# Altium PCB THB7128v1,1.PcbDoc
Units mm, origin at the board's own origin, x right, y up, seen from the top; angles counter-clockwise.
Board outline 461.77 x 306.45 mm, 2 copper layers (Top Layer, Bottom Layer); 27 components, 19 nets, 85 pads, 20 vias.
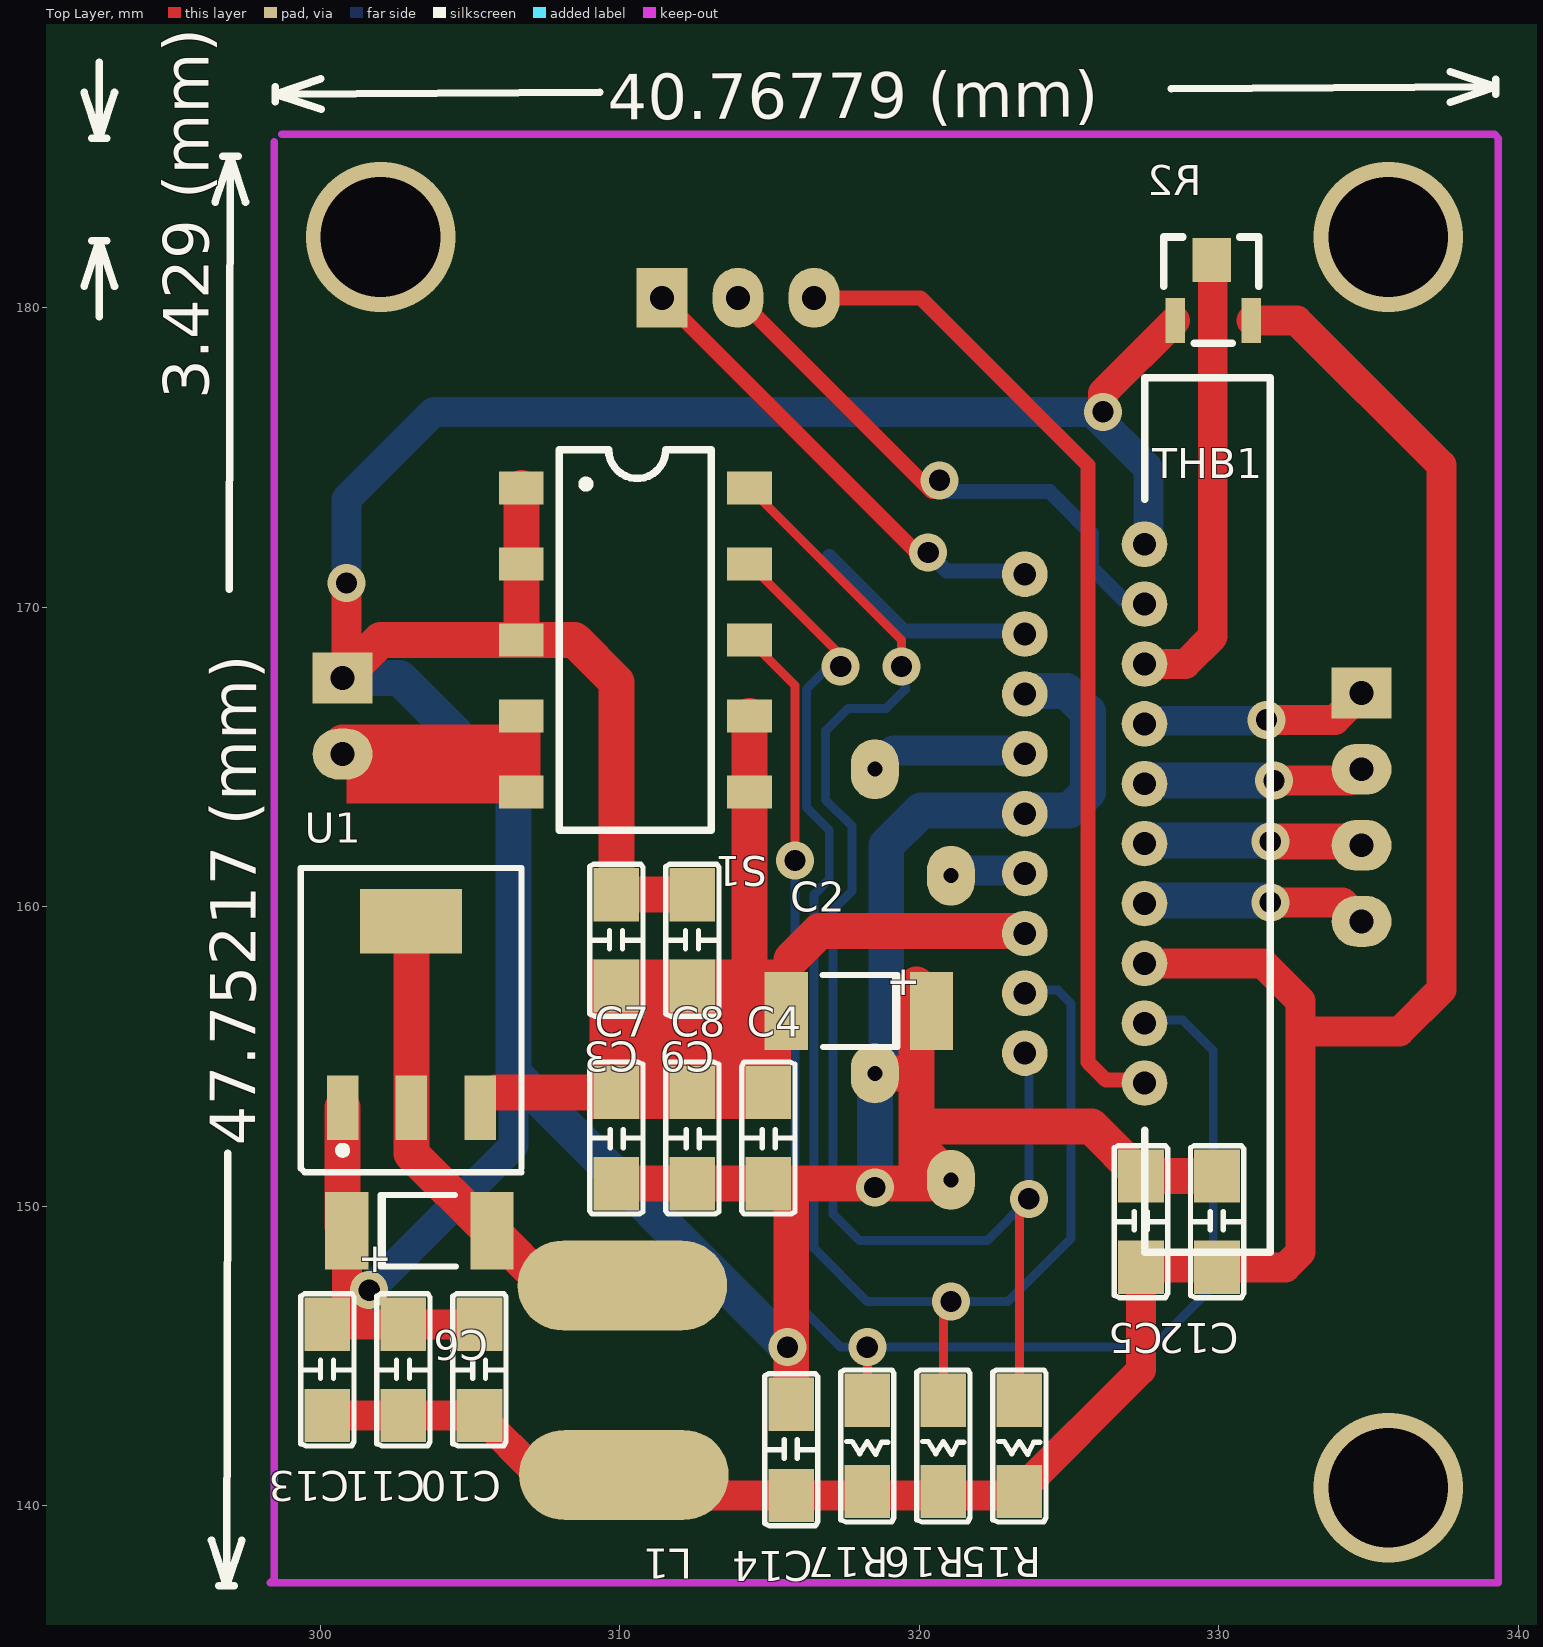
[diagram p0: Top Layer view]
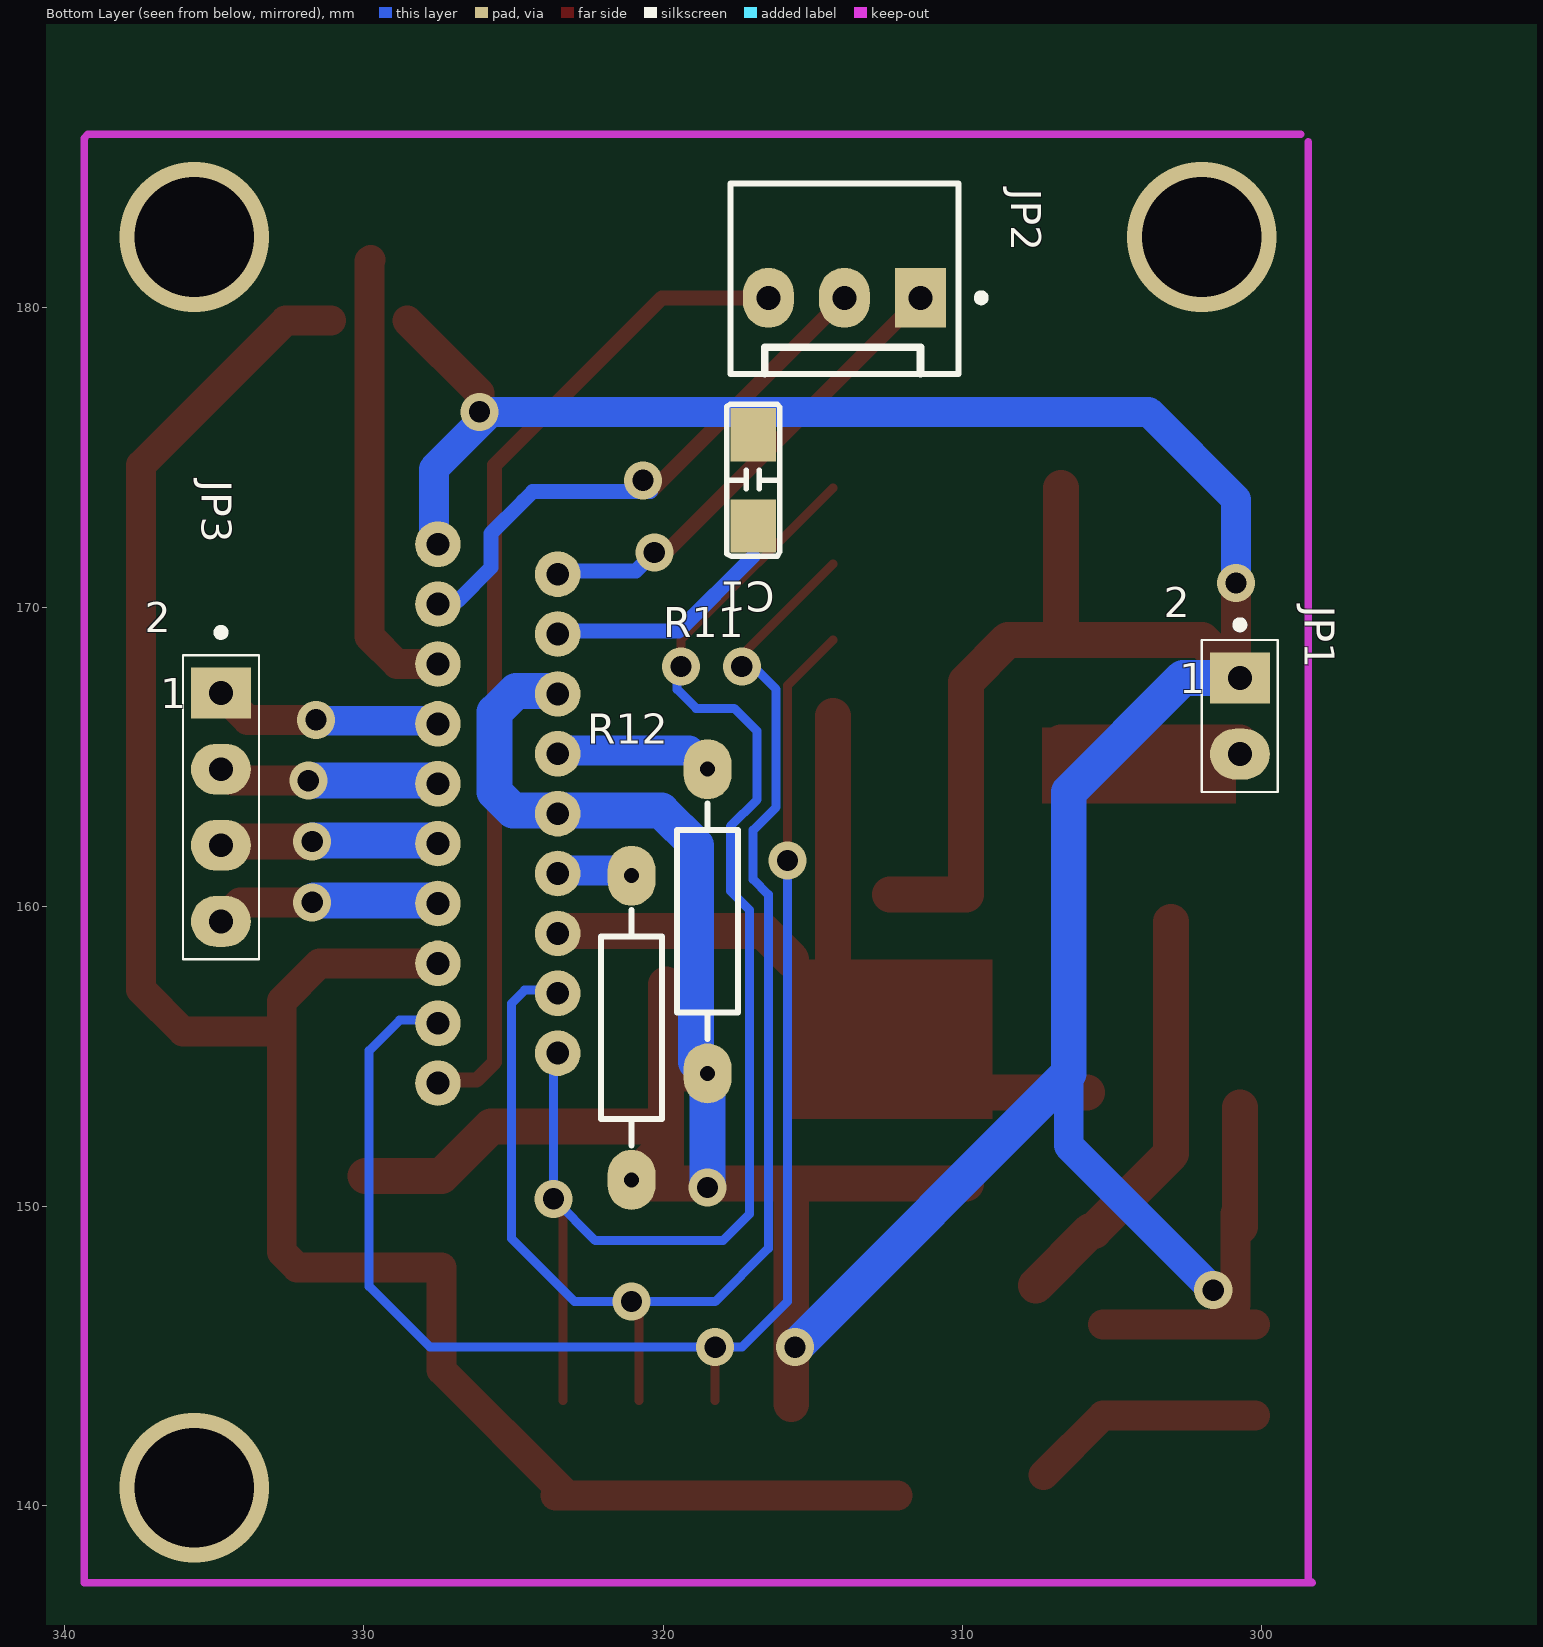
[diagram p1: Bottom Layer view, seen from below]

## Layer stack, top to bottom
Top Layer: signal copper 0.0356
Dielectric: dielectric 0.32, FR-4, Dk 4.8
Bottom Layer: signal copper 0.0356

## Board outline
84.709,340.995 84.709,36.068 86.233,34.544 546.481,34.544 546.481,340.995

## Design rules (kind name [scope] priority, off if disabled: settings)
Clearance [All] p1: gap=0.254
HoleSize [All] p1: absolutevalues=TRUE maxlimit=7 minlimit=0.025 maxpercent=80.000 minpercent=20.000
HoleToHoleClearance [All] p1 off: gap=0.254 allowstackedmicrovias=TRUE
LayerPairs [All] p1 off: enforce=TRUE
MinimumSolderMaskSliver [All] p1 off: minsoldermaskwidth=0.254
NetAntennae [All] p1 off: netantennaetolerance=0
PolygonConnect [All] p1: connectstyle=Relief reliefconductorwidth=0.254 reliefentries=4 polygonreliefangle="90 Angle"
RoutingVias [All] p1: holewidth=0.711 width=1.27 viastyle="Through Hole" minholewidth=0.711 minwidth=1.27 maxholewidth=0.711 maxwidth=1.27
SilkToSilkClearance [All] p1 off: silktosilkclearance=0.254
SilkscreenOverComponentPads [All] p1 off: minsilkscreentomaskgap=0.254
SolderMaskExpansion [All] p1: expansion=0.102
TestPointUsage [All] p1: valid=0 allowmultiple=FALSE
Testpoint [All] p1: side=15 testpointundercomponent=TRUE minsize=1.016 maxsize=2.54 preferedsize=1.524 minholesize=0 maxholesize=1.016 preferedholesize=0.813 testpointgrid=0.025 style=1023 order=0123456789
Width [All] p1: maxlimit=2 minlimit=0.3 preferedwidth=0.8
17 further rules are at their usual default settings.

## Components (designator, comment, footprint, x,y, rotation, side; value= is the part's Value field where it differs from the comment)
C1 "CAP" CC1005-0402 316.992,175.768 r270 bottom
C2 "Cap Pol1" "diode stan" 318.008,156.464 r0 top
C3 "CAP_1" CC1005-0402 309.88,160.401 r270 top
C4 "CAP" CC1005-0402 314.96,150.749 r90 top
C5 "CAP" CC1005-0402 327.406,151.003 r270 top
C6 "Cap Pol1" "diode stan" 303.276,149.225 r180 top
C7 "CAP_1" CC1005-0402 309.88,150.749 r90 top
C8 "CAP_1" CC1005-0402 312.42,150.749 r90 top
C9 "CAP_1" CC1005-0402 312.42,160.401 r270 top
C10 "CAP_1" CC1005-0402 305.308,146.05 r270 top
C11 "CAP_1" CC1005-0402 302.768,146.05 r270 top
C12 "CAP_1" CC1005-0402 329.946,151.003 r270 top
C13 "CAP_1" CC1005-0402 300.228,146.05 r270 top
C14 "CAP_1" CC1005-0402 315.722,143.383 r270 top
JP1 "Header 2" HDR1-2 300.736,167.64 r180 bottom
JP2 "H-3" "H- 3" 311.404,180.34 r270 bottom
JP3 "Header 4" HDR1-4 334.772,167.132 r180 bottom
L1 "INDUCTOT" 贴片电感 313.436,148.336 r180 top
R2 "RES-Pot2" res-adj-tiepian 328.168,178.816 r0 top
R11 "Res" AXLAL0.4 318.516,159.512 r90 bottom
R12 "Res" AXLAL0.4 321.056,155.956 r90 bottom
R15 "Res" R2012-0805 323.342,143.51 r270 top
R16 "Res" R2012-0805 320.802,143.51 r270 top
R17 "Res" R2012-0805 318.262,143.51 r270 top
S1 "SW-DIP5" SW-5 306.705,173.99 r270 top
THB1 "U1" THB7218 331.724,148.336 r90 top
U1 "LM1117" DSO-G3/P2.3 300.736,153.289 r0 top

## Footprints (in the part's own frame and the unit in brackets; to place one, negate y for a bottom-side part, rotate by r counter-clockwise, add the part's x,y. Pads: shape width x height; smd on the part's side, far side on the other; paste and mask are expansions set on the pad)
AXLAL0.4 [mm]
  oval 2x1.6 hole 0.5: 1(-5.08,0) 2(5.08,0)
  silkscreen extent -3.94,-1.02 3.94,1.02
CC1005-0402 [mil]
  rect 70x60 smd: 1(0,0) 2(120,0)
  silkscreen extent -40,-35 160,35
"diode stan" [mm]
  rect 1.45x2.6 smd: 1(-2.45,0.051) 2(2.4,0.051)
  silkscreen extent -1.24,-1.15 1.27,1.25, body extent -2.51,-1.24 2.44,1.35, height 1.27
DSO-G3/P2.3 [mil]
  rect 41.34x85 smd: 1(181.1,0) 2(0,0) 3(90.55,0)
  rect 133.86x85 smd: 3(90,245)
  silkscreen extent -55,-85 235,315
"H- 3" [mm]
  rect 2x1.7 hole 0.8: 1(0,0)
  oval 2x1.7 hole 0.8: 2(0,-2.54) 3(0,-5.08)
  silkscreen extent -3.81,-6.35 2.54,2.15
HDR1-2 [mm]
  rect 2x1.7 hole 0.8 unplated: 1(0,0)
  oval 2x1.7 hole 0.8 unplated: 2(0,-2.54)
  silkscreen extent -1.27,-3.81 1.27,1.9
HDR1-4 [mm]
  rect 2x1.7 hole 0.8 unplated: 1(0,0)
  oval 2x1.7 hole 0.8 unplated: 2(0,-2.54) 3(0,-5.08) 4(0,-7.62)
  silkscreen extent -1.27,-8.89 1.27,2.15
R2012-0805 [mil]
  rect 70x60 smd: 1(0,0) 2(120,0)
  silkscreen extent -40,-35 160,35
res-adj-tiepian [mm]
  rect 0.66x1.5 smd: 1(2.921,0.762) 3(0.381,0.762)
  rect 1.3x1.47 smd: 2(1.6,2.794)
  silkscreen extent 0,0 3.17,3.56
SW-5 [mm]
  rect 1.1x1.5 smd: 1(0,0) 2(2.54,0) 3(5.08,0) 4(7.62,0) 5(10.16,0) 6(10.16,7.62) 7(7.62,7.62) 8(5.08,7.62) 9(2.54,7.62) 10(0,7.62)
  silkscreen extent -1.27,1.27 11.43,6.35
THB7218 [mil]
  round 60 hole 30: 1(935.91,165.35) 2(896.54,322.83) 3(857.17,165.35) 4(817.8,322.83) 5(778.43,165.35) 6(739.06,322.83) 7(699.69,165.35) 8(660.31,322.83) 9(620.94,165.35) 10(581.57,322.83) 11(542.2,165.35) 12(502.83,322.83) 13(463.46,165.35) 14(424.09,322.83) 15(384.72,165.35) 16(345.35,322.83) 17(305.98,165.35) 18(266.61,322.83) 19(227.24,165.35)
  silkscreen extent 5,0 1155,165
贴片电感 [mm]
  oval 7x3 smd: 1(3.353,0.991) 2(3.302,7.315)
  body extent -0.33,0.44 6.76,7.54, height 1.27

## Part data
C1 C3 C4 C5 C7 C8 C9 C10 C11 C12 C13 C14: "Capacitor"
C2 C6: "Polarized Capacitor (Radial)"
JP1: library part "Header 2X2", "Header, 2-Pin, Dual row"
JP2: "Header, 3-Pin"
JP3: library part "Header 2X4", "Header, 4-Pin, Dual row"
L1: "Inductor"
R2: "Potentiometer"
R11 R12 R15 R16 R17: "Resistor"
S1: "DIP Switch,5-bit"
THB1: library part THB7128

## Via types
v1: diameter 1.27, hole 0.711, Top Layer to Bottom Layer, 17 vias
v2: diameter 5, hole 4, Top Layer to Bottom Layer, 3 vias

## Nets (pads, with @x,y where several pads share a name; then routed paths per layer and width w, separated by ;. In a path a pad name is that pad's centre, name@x,y a point inside that pad or via, vN(x,y) a via of type N, cw(c..) or ccw(c..) an arc to the next point about the centre after c; other vN are vias at no path point)
CLK: JP2.2 THB1.3 | length 18.6
  Top Layer w0.5: JP2.2 v1@320.421,173.863
  Bottom Layer w0.5: v1@320.421,173.863 324.358,173.863 324.675,173.546 325.755,172.466 325.755,171.323 326.866,170.212 THB1.3@327.66,170.212
  other v1: 320.675,174.244
CWW: JP2.1 THB1.2 | length 15.7
  Top Layer w0.5: JP2.1 315.404,176.339 v1@319.913,171.831
  Bottom Layer w0.5: v1(320.294,171.831) 320.913,171.212 THB1.2@323.66,171.212
EN: JP2.3 THB1.19 | length 33.7
  Top Layer w0.5: JP2.3 320.04,180.34 325.628,174.752 325.628,154.813 326.229,154.212 THB1.19@327.66,154.212
GND: C1.1 C2.2 C3.1 C4.1 C5.1 C6.2 C7.1 C8.1 C9.1 C10.1 C11.1 C12.1 C13.1 C14.1 JP1.1 R2.3 R11.1 R12.1 S1.1 S1.2 S1.3 THB1.1 THB1.6 THB1.10 U1.2 | length 180.6
  Top Layer w1: C13.1 C11.1 ; JP1.1@300.863,167.767 v1(300.863,170.815) ; C6.2@300.876,149.746 C6.2 300.876,146.698 301.525,146.05 C11.1 ; C10.1 C11.1 ; v1(326.136,176.53) 326.136,177.165 R2.3
  Top Layer w1.2: C6.2@300.736,149.315 U1.2 ; JP1.1 300.863,167.767 302.006,168.91 S1.3 ; S1.1 S1.2 S1.3 ; C7.1 C8.1 C4.1 R12.1@320.929,150.749 ; C9.1 C3.1 309.88,167.513 308.483,168.91 S1.3 ; C14.1 315.722,150.622 ; R11.1 319.9,154.432 ; 319.9,150.99 319.9,152.654 ; C2.2@319.9,157.404 319.9,154.432 ; 320.04,151.892 R12.1 ; C12.1 C5.1 325.755,152.654 319.9,152.654 ; 319.9,152.654 319.9,154.432
  Bottom Layer w1: v1(300.863,170.815) 300.863,173.609 303.784,176.53 325.755,176.53 327.66,174.625 THB1.1@327.66,172.212 ; v1(301.625,147.193) 306.451,152.019 306.451,154.432
  Bottom Layer w1.2: JP1.1 302.641,167.64 306.451,163.83 306.451,154.432 v1(315.595,145.288) ; v1@318.516,150.876 R11.1 ; R11.1@318.897,154.813 318.897,162.052 320.057,163.212 323.66,163.212 325.01,163.212 325.628,163.83 325.628,166.497 324.913,167.212 THB1.6@323.66,167.212
  other v1: 318.516,150.622
M1: R16.1 S1.9 THB1.16 | length 47.8
  Top Layer w0.3: S1.9 v1@317.563,168.212 ; R16.1 v1@320.802,146.558
  Bottom Layer w0.3: v1@317.183,168.212 316.23,167.259 316.23,163.322 316.992,162.56 316.992,160.909 316.484,160.401 316.484,148.59 318.262,146.812 322.961,146.812 325.064,148.915 325.064,156.774 324.626,157.212 THB1.16@323.66,157.212
  other v1: 321.056,146.812 317.373,168.021
M2: R17.1 S1.8 THB1.17 | length 50.4
  Top Layer w0.3: S1.8 315.849,167.386 v1(315.849,161.544) ; R17.1 v1(318.262,145.288)
  Bottom Layer w0.3: v1(315.849,161.544) 315.849,146.812 317.373,145.288 v1(318.262,145.288) 327.787,145.288 329.819,147.32 329.819,155.194 328.801,156.212 THB1.17@327.66,156.212
M3: R15.1 S1.10 THB1.18 | length 47.6
  Top Layer w0.3: S1.10 319.405,168.91 v1(319.405,168.021) ; R15.1 v1@323.342,149.923
  Bottom Layer w0.3: v1@319.532,167.894 319.532,167.259 318.897,166.624 317.627,166.624 316.865,165.862 316.865,163.576 317.754,162.687 317.754,160.528 317.119,159.893 317.119,149.733 318.008,148.844 322.263,148.844 v1(323.66,150.241) THB1.18@323.66,155.212
NetC1_2: C1.2 THB1.4 | length 7.7
  Bottom Layer w0.5: 316.992,171.704 319.484,169.212 THB1.4@323.66,169.212
NetC6_1: C6.1 L1.1 U1.3 | length 14
  Top Layer w1.2: U1.3@303.036,159.498 303.036,153.289 303.036,151.751 C6.1@305.613,149.174 ; C6.1 L1.1@307.555,147.345
NetJP3_1: JP3.1 THB1.7 | length 7.4
  Top Layer w1: v1(331.597,166.243) 333.883,166.243 JP3.1
  Bottom Layer w1: THB1.7@327.66,166.212 v1@331.566,166.212
NetJP3_2: JP3.2 THB1.9 | length 7.3
  Top Layer w1: v1(331.851,164.211) 334.391,164.211 JP3.2
  Bottom Layer w1.2: THB1.9@327.66,164.212 v1(331.851,164.211)
NetJP3_3: JP3.3 THB1.11 | length 7
  Top Layer w1.2: v1(331.724,162.179) JP3.3@334.645,162.179
  Bottom Layer w1.2: THB1.11@327.66,162.212 v1@331.691,162.212
NetJP3_4: JP3.4 THB1.13 | length 7.3
  Top Layer w1: v1(331.724,160.147) 334.137,160.147 JP3.4
  Bottom Layer w1.2: THB1.13@327.66,160.212 v1@331.659,160.212
NetR11_2: R11.2 THB1.8 | length 4.5
  Bottom Layer w1: R11.2@319.136,165.212 THB1.8@323.66,165.212
NetR12_2: R12.2 THB1.12 | length 2.4
  Bottom Layer w1: R12.2@321.232,161.212 THB1.12@323.66,161.212
VCC_5V: C5.2 C10.2 C11.2 C12.2 C13.2 C14.2 L1.2 R2.1 R15.2 R16.2 R17.2 THB1.15 | length 78.8
  Top Layer w1: C13.2 C11.2 C10.2 L1.2@307.289,141.021 ; L1.2@312.166,140.335 C14.2 320.802,140.335 R15.2@323.596,140.335 ; R15.2 327.406,144.526 C5.2 C12.2 332.232,147.955 332.74,148.463 332.74,156.845 331.477,158.108 THB1.15 ; R2.1 332.613,179.578 337.439,174.752 337.439,157.226 336.042,155.829 333.248,155.829
VCC_12V: C2.1 C3.2 C4.2 C7.2 C8.2 C9.2 S1.6 S1.7 THB1.14 U1.1 | length 30.8
  Top Layer w1.2: U1.1@305.844,153.797 C7.2 C8.2 C4.2 ; C3.2 C9.2 C2.1@314.999,157.353 ; 314.325,158.128 S1.6 S1.7 ; 315.722,158.242 316.662,159.182 THB1.14@323.63,159.182
VCC_12V_IN: JP1.2 S1.4 S1.5 | length 6
  Top Layer w1.2: JP1.2@300.736,165.481 306.705,165.481
VREF: R2.2 THB1.5 | length 15.3
  Top Layer w1: THB1.5 328.89,168.108 329.803,169.021 329.803,181.575 R2.2
copper on no net:
  other v2: 335.661,140.589 302.006,182.372 335.661,182.372

## Keep-outs
Keep-Out Layer:
  lines w0.254: 298.45,185.547 298.45,137.541 298.323,137.414 339.344,137.414 339.344,138.43 339.344,185.674 339.217,185.801 298.704,185.801

## Other copper
Top Layer:
  rectangle net VCC_12V_IN: 300.863,163.449 307.34,165.989
  rectangle net VCC_12V: 308.991,152.908 315.722,158.242

## Silkscreen, mask and mechanical layers (free items; w line width, h text height)
Top Overlay:
  lines w0.254: 292.1,180.721 292.608,182.245 ; 292.1,187.198 292.608,185.674 ; 292.354,182.245 292.862,182.245 ; 292.354,185.674 292.862,185.674 ; 292.608,179.705 292.608,182.245 ; 292.608,188.214 292.608,185.674 ; 293.116,180.721 292.608,182.245 ; 293.116,187.198 292.608,185.674 ; 296.358,138.837 296.862,137.312 ; 296.477,183.541 296.989,185.064 ; 296.608,137.313 297.116,137.311 ; 296.735,185.065 297.243,185.063 ; 296.9,151.767 296.862,137.312 ; 296.95,170.608 296.989,185.064 ; 297.374,138.835 296.862,137.312 ; 297.493,183.539 296.989,185.064 ; 298.49,187.393 298.493,186.885 ; 300.012,187.656 298.491,187.139 ; 300.018,186.64 298.491,187.139 ; 309.327,187.206 298.491,187.139 ; 328.422,187.325 339.258,187.393 ; 337.731,187.891 339.258,187.393 ; 337.737,186.875 339.258,187.393 ; 339.257,187.647 339.26,187.139
  text "40.76779 (mm)" at 309.587,186.293 h1.52 r0.36
  text "3.429 (mm)" at 296.265,176.951 h1.52 r90
  text "47.75217 (mm)" at 297.815,152.019 h1.52 r89.85

## Text inside footprints (layer, text, board x,y; h text height)
C2: Top Overlay "+" at 318.897,157.048 h1
C6: Top Overlay "+" at 302.387,148.641 h1 r180
JP1: Bottom Overlay "1" at 302.768,167.132 h1; Bottom Overlay "2" at 303.276,169.672 h1
JP3: Bottom Overlay "2" at 337.312,169.164 h1; Bottom Overlay "1" at 336.804,166.624 h1